# Altium PCB CP100-(5V1A)_V1.0.PcbDoc
Units mm, origin at the board's own origin, x right, y up, seen from the top; angles counter-clockwise.
Board outline 28 x 43 mm, 2 copper layers (Top Layer, Bottom Layer); 13 components, 13 nets, 42 pads, 3 vias.
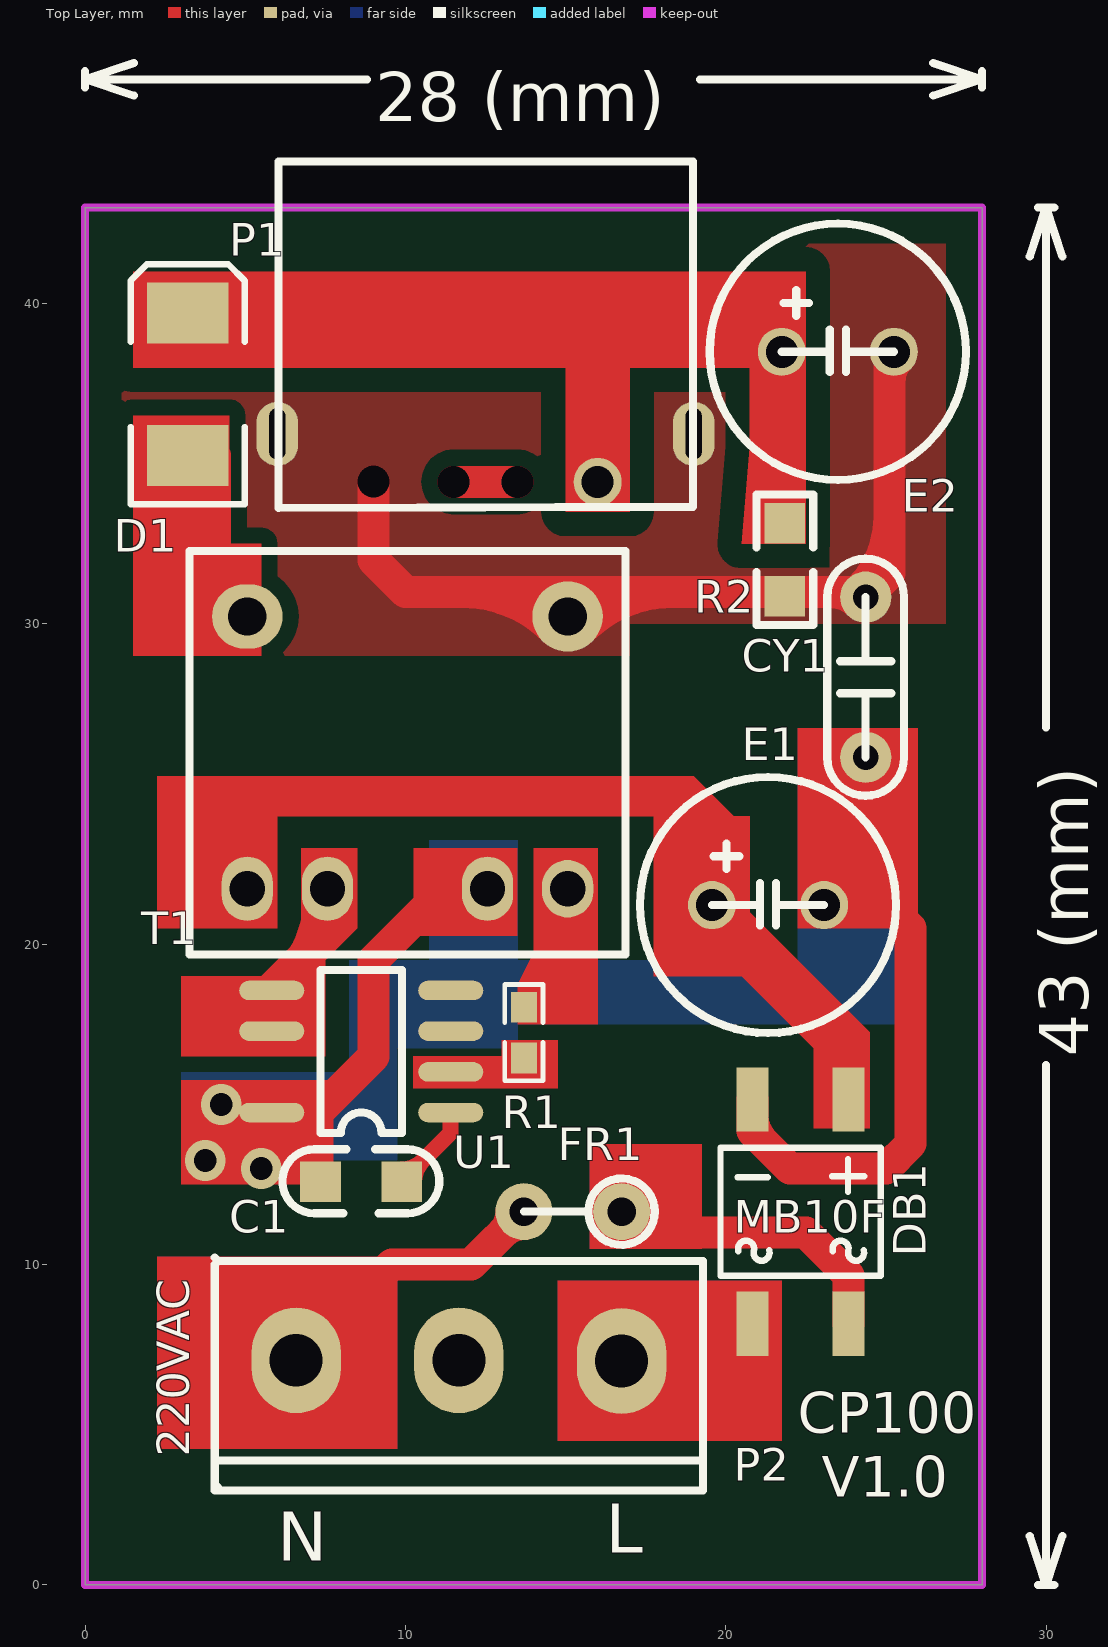
[diagram p0: Top Layer view]
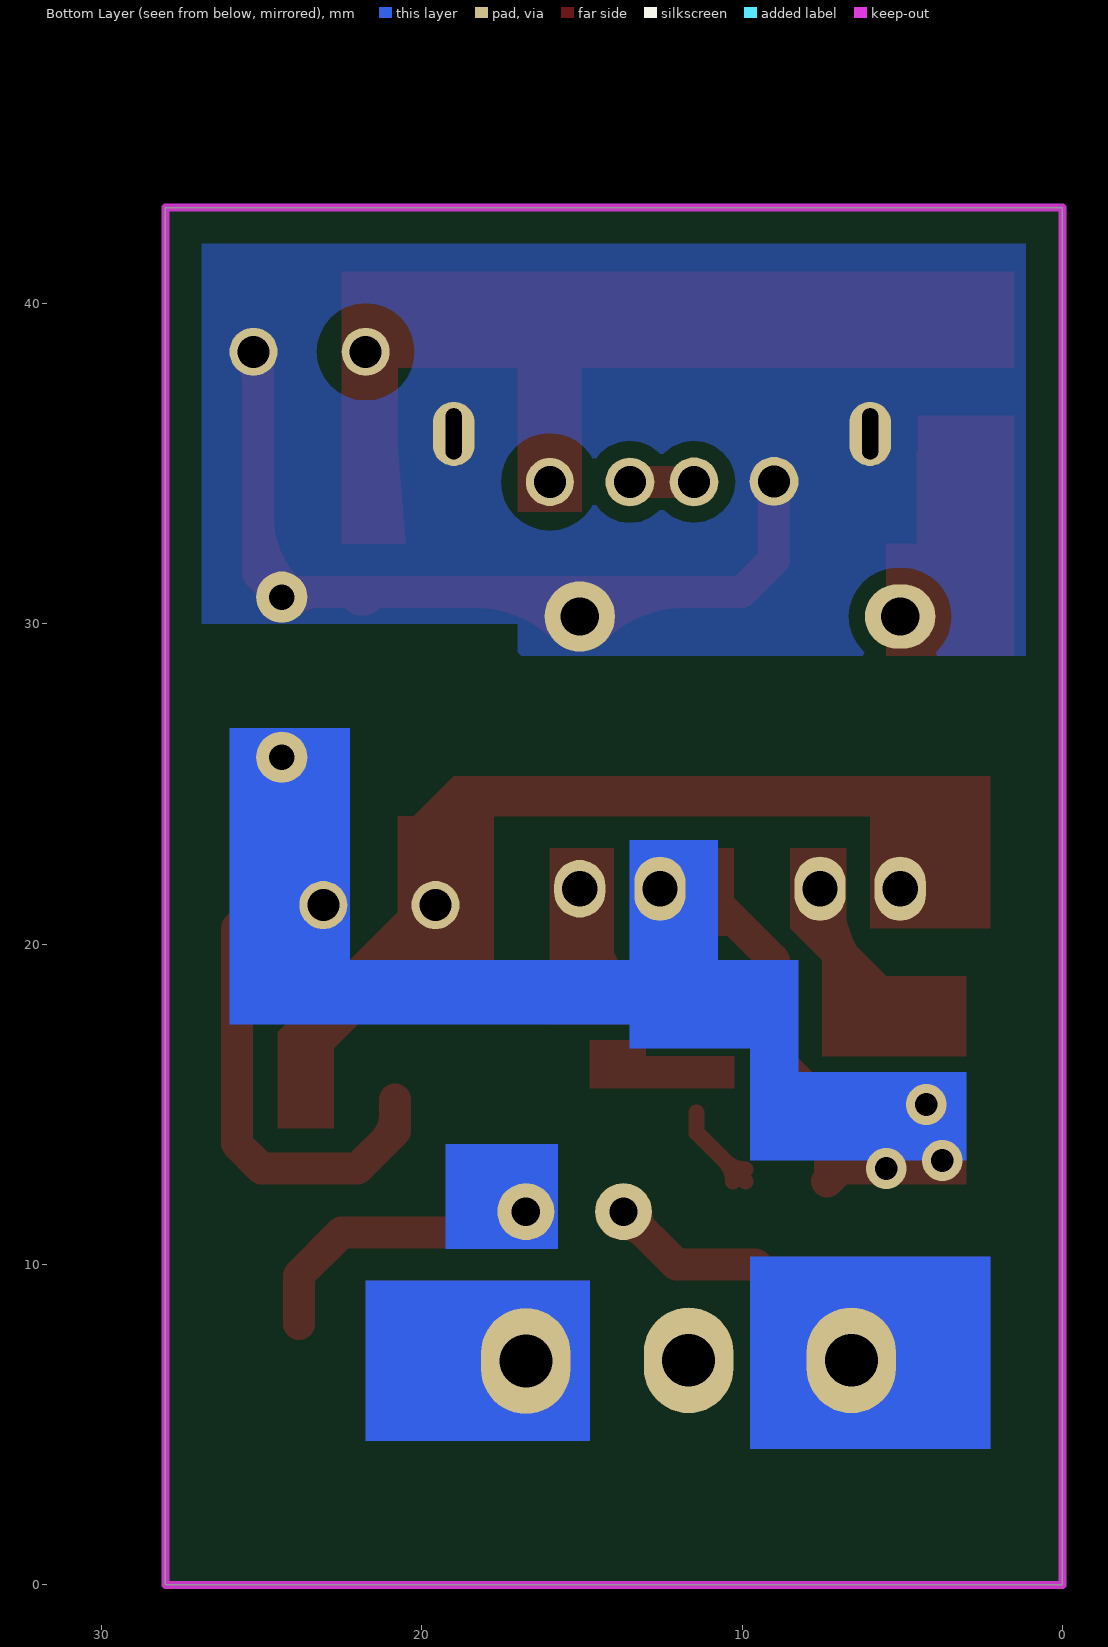
[diagram p1: Bottom Layer view, seen from below]

## Layer stack, top to bottom
Top Layer: signal copper 0.0356
Dielectric: dielectric 0.32, FR-4, Dk 4.8
Bottom Layer: signal copper 0.0356

## Board outline
0,0 0,43 28,43 28,0

## Design rules (kind name [scope] priority, off if disabled: settings)
Clearance "All to Keep-Out Layer" [All vs OnLayer('Keep-Out Layer')] p1: gap=1
Clearance "GND to 5V" [InNet('GND') vs InNet('5V')] p2: gap=0.762
Clearance "GND to All" [InNet('GND')] p3: gap=0.508
Clearance [All] p4: gap=0.254
HoleSize [All] p1: absolutevalues=TRUE maxlimit=25.4 minlimit=0.025 maxpercent=80.000 minpercent=20.000
MinimumSolderMaskSliver [All] p1: minsoldermaskwidth=0
PlaneConnect [All] p1: planeconnectstyle=Direct reliefexpansion=0.508 reliefentries=4 reliefconductorwidth=0.254 reliefairgap=0.254
PolygonConnect [All] p1: connectstyle=Direct reliefconductorwidth=0.254 reliefentries=4 polygonreliefangle="90 Angle"
RoutingVias [All] p1: holewidth=0.711 width=1.27 viastyle="Through Hole" minholewidth=0.711 minwidth=1.27 maxholewidth=0.711 maxwidth=1.27
SilkToSilkClearance [All] p1: silktosilkclearance=0
SilkscreenOverComponentPads [All] p1: minsilkscreentomaskgap=0
SolderMaskExpansion [All] p1: expansion=0.102
Width [All] p1: maxlimit=254 minlimit=0.254 preferedwidth=0.254
23 further rules are at their usual default settings.

## Components (designator, comment, footprint, x,y, rotation, side; value= is the part's Value field where it differs from the comment)
C1 "1uF/16V" 0805_C 8.62,12.588 r180 top
CY1 "102M/1KV" CY-5MM 24.368,28.336 r90 top
D1 "SS24" DO-214AC(SMA) 3.2,37.48 r270 top
DB1 "MB10F" MB10F 22.336,11.652 r90 top (schematic designator BD1)
E1 "4.7uF/400V" CS_220uF/25V 21.32,21.224 r0 top
E2 "470uF/10V" CS_470uF/16V 23.5,38.496 r0 top
FR1 "10R/0.5W" R0.12L 16.748,11.652 r180 top
P1 "USB-A" USB-AF10.6/90 16,34.432 r180 top locked
P2 "220VAC" KF5.08-3P 11.668,7 r180 top locked
R1 "110K/1%" 0603_RN 13.7,17.24 r90 top
R2 "1.2K" 0805_R 21.844,32.004 r90 top
T1 "EE12.7 5+5(V)" "EE12.7 5+5(V)" 5.064,21.732 r90 top locked
U1 "LP3667B" SOP7 8.62,16.652 r180 top

## Footprints (in the part's own frame and the unit in brackets; to place one, negate y for a bottom-side part, rotate by r counter-clockwise, add the part's x,y. Pads: shape width x height; smd on the part's side, far side on the other; paste and mask are expansions set on the pad)
0603_RN [mm] "SMD Resistor"
  rect 0.96x0.8 smd: 1(-0.79,0) 2(0.79,0)
  silkscreen extent -1.5,-0.6 1.5,0.6
0805_C [mm] "SMD Capacitor"
  rect 1.27x1.27 smd: 1(-1.27,0) 2(1.27,0)
  silkscreen extent -2.44,-1.01 2.46,0.99
0805_R [mil] "SMD Resistor"
  rect 50x50 smd: 1(-45,0) 2(45,0)
  silkscreen extent -80,-35 80,35
CS_220uF/25V [mm] "PTH  Electrolytic  Capacitor"
  round 1.5 hole 1: 1(-1.75,0) 2(1.75,0)
  silkscreen extent -4,-4 4,4
CS_470uF/16V [mm] "PTH  Electrolytic  Capacitor"
  round 1.5 hole 1: 1(-1.75,0) 2(1.75,0)
  silkscreen extent -4,-4 4,4
CY-5MM [mm]
  round 1.6 hole 0.8: 1(-2.5,0) 2(2.5,0)
  silkscreen extent -3.7,-1.2 3.7,1.2
DO-214AC(SMA) [mil] "SMD Diode"
  rect 75x100 smd: A(87.5,0) K(-87.5,0)
  silkscreen extent -147,-70 148,70
"EE12.7 5+5(V)" [mm]
  oval 2x1.6 hole 1.1: 1(0,0) 2(0,-2.5) 4(0,-7.5)
  oval 1.8x1.6 hole 1.1: 5(0,-10)
  round 2.2 hole 1.2: 6(8.5,-10)
  oval 2x2.2 hole 1.2: 10(8.5,0)
  silkscreen extent -2.05,-11.8 10.55,1.8
KF5.08-3P [mil]
  oval 110x130 hole 65: 1(-200,0.5) 2(0,-0.5) 3(200,-0.5)
  silkscreen extent -300,-127 300,160
MB10F [mm]
  rect 2x1 smd: 1(-3.5,1.5) 2(-3.5,-1.5) 3(3.5,-1.5) 4(3.5,1.5)
  silkscreen extent -2,-2.5 2,2.5
R0.12L [mil]
  round 70 hole 35: 1(0,0) 2(120,0)
  silkscreen extent -41,-41 120,41
SOP7 [mil]
  oval 80x24 smd: 1(-110,75) 2(-110,25) 3(-110,-25) 4(-110,-75) 5(110,-75) 6(110,-25) 7(110,75)
  silkscreen extent -50,-100 50,100
USB-AF10.6/90 [mm]
  round 1.5 hole 1: 1(0,0)
  round 0 / inner round 1.524 / far side round 1.524 hole 1: 2(2.5,0) 3(4.5,-0.003) 4(7,-0.018)
  oval 1.3x2 hole 0.5 slot 1.6 at 90 deg: 5(-3,-1.5) 5(10,-1.5)
  silkscreen extent -2.98,-10 9.97,0.81

## Part data
C1 CY1: library part Cap1
D1: library part Diode-A, "SS14,SS24,SS34,M7"
E1 E2: library part "Cap Pol1"
FR1 R1 R2: library part Res1
P2: library part "Header 3", "Header, 3-Pin"
U1: "LP3667A, LP3667B, LP3667AH, LP3667BH"

## Via types
v1: diameter 1.27, hole 0.711, Top Layer to Bottom Layer, 3 vias

## Nets (pads, with @x,y where several pads share a name; then routed paths per layer and width w, separated by ;. In a path a pad name is that pad's centre, name@x,y a point inside that pad or via, vN(x,y) a via of type N, cw(c..) or ccw(c..) an arc to the next point about the centre after c; other vN are vias at no path point)
+5V: D1.K E2.1 P1.1 R2.2 | length 24.8
  Top Layer w1: D1.K@3.837,39.383 cw(c4.61,38.61) 4.61,39.703 cw(c4.61,40.795) D1.K@3.837,40.022 ; D1.K@4.048,39.703 17,39.703 ; P1.1 16,38.703 17,39.703 ; 21.404,39.703 17,39.703
GND: CY1.2 E2.2 P1.4 P1.5 R2.1 T1.6 | length 40.9
  Top Layer w1: P1.4 9,32 10,31 15.064,31 24.204,31 CY1.2 25.11,31.578 E2.2@25.11,38.496 ; 11.761,31 cw(c11.761,26.929) T1.6@14.64,29.808 ; 14.176,31 cw(c14.176,29.344) T1.6@15.347,30.515 ; T1.6@14.781,30.515 cw(c15.952,29.344) 15.952,31 ; T1.6@15.488,29.808 cw(c18.367,26.929) 18.367,31 ; 21.183,31 cw(c21.183,30.2) R2.1@21.749,30.766 ; R2.1@21.939,30.766 cw(c22.505,30.2) 22.505,31 ; 23.248,31 cw(c23.248,29.716) CY1.2@24.156,30.624 ; CY1.2@24.156,31.048 ccw(c21.852,33.352) 25.11,33.352 ; 25.11,37.554 cw(c26.192,37.554) E2.2@25.427,38.319
GND_P: C1.2 CY1.1 DB1.4 E1.2 T1.4 U1.7 | length 42.7
  Top Layer w1: U1.7 5.826,14.112 ; U1.7@6.356,14.819 ccw(c7.7,14.284) 6.677,13.261 ; U1.7@6.438,14.579 ccw(c6.745,15.1) 7.172,14.672 ; U1.7@6.537,14.552 ccw(c6.537,15.794) 7.416,14.916 ; C1.2 5.826,14.112 ; T1.4 11.232,21.732 9,19.5 9,16.5 6.612,14.112 5.826,14.112 ; DB1.4@20.836,14.652 ccw(c22.014,14.652) 21.181,13.819 ; DB1.4 20.836,14.164 22,13 25,13 25.773,13.773 25.773,20.5 24.368,21.905 24.368,22.522 ; E1.2 24.368,22.522 ; CY1.1 24.368,24 24.368,22.522 ; 5.826,13.794 cw(c7.16,13.794) 6.43,14.91 ccw(c7.16,13.794) 5.826,13.794
  other v1: 5.5,13 3.75,13.25 4.25,15
L: DB1.1 P2.1 | length 8.8
  Top Layer w1: P2.1 19.751,6.987 DB1.1@20.876,8.112 ; P2.1@17.382,6.353 cw(c18.914,4.822) 18.914,6.987 cw(c18.914,9.153) P2.1@17.382,7.622 ; 20.119,7.355 cw(c20.836,6.638) DB1.1@20.836,7.652
N: FR1.2 P2.3 | length 13.9
  Top Layer w1: P2.3 9.575,10 12.048,10 FR1.2 ; P2.3@6.588,8.164 ccw(c6.588,10.942) 8.553,8.978 ; P2.3@7.485,7.267 cw(c9.037,7.267) 7.94,8.364 ; FR1.2@13.311,11.652 cw(c12.372,11.652) 13.036,10.988 cw(c13.7,10.324) FR1.2@13.7,11.263
NetC1_1: C1.1 U1.1 | length 4.3
  Top Layer w0.5: C1.1 11.414,14.112 U1.1 ; C1.1@9.89,12.973 ccw(c9.89,13.902) 10.547,13.245 ccw(c11.204,12.588) C1.1@10.275,12.588
NetD1_A: D1.A T1.10 | length 7.7
  Top Layer w1: D1.A@3.198,34.938 cw(c1.144,32.884) 4.048,32.884 ; D1.A@4.048,35.258 4.048,31.248 T1.10
NetDB1_2: DB1.2 FR1.1 | length 11.9
  Top Layer w1: FR1.1 17.4,11 22.5,11 23.836,9.664 DB1.2 ; FR1.1@17.023,11.927 ccw(c19.261,14.165) 19.261,11
NetDB1_3: DB1.3 E1.1 T1.1 | length 24.6
  Top Layer w1: T1.1 5.064,23.064 ; 6.5,24.5 18,24.5 19.57,22.93 E1.1 23.836,16.958 DB1.3
NetP1_2: P1.2 P1.3 | length 2
  Top Layer w1: 11.503,34.432 P1.2
NetR1_1: R1.1 U1.2 | length 4.1
  Top Layer w0.5: U1.2 13.267,16.017 R1.1 ; 12.486,16.017 ccw(c12.486,17.584) R1.1@13.594,16.476 ; R1.1@13.307,16.057 cw(c13.7,15.665) R1.1@13.7,16.22
NetR1_2: R1.2 T1.5 | length 6.8
  Top Layer w0.5: R1.2 15.064,19.394 T1.5 ; R1.2@13.7,18.26 ccw(c13.7,18.815) R1.2@14.093,18.423 ; T1.5@14.675,21.243 cw(c13.736,20.304) 15.064,20.304 cw(c16.392,20.304) T1.5@15.453,21.243
NetT1_2: T1.2 U1.5 U1.6 | length 8.7
  Top Layer w1: U1.6 U1.5 7.564,20.295 T1.2 ; U1.5@6.342,18.557 cw(c7.588,18.557) 6.707,19.438 ; 6.445,19.176 ccw(c4.423,21.197) T1.2@7.266,21.5
pads on no net: P2.2 U1.3 U1.4

## Polygon pours and split planes (outlines as drawn)
GND on Top Layer "Bot Layer-No Net" (solid, remove dead copper, pour order 1000): 1,42.4 27.4,42.4 27.4,30 17,30 17,29 1,29 1,42.4
GND on Bottom Layer "Bot Layer-No Net" (solid, remove dead copper, pour order 1001): 1,42.4 27.4,42.4 27.4,30 17,30 17,29.115 16.885,29 1,29 1,42.4

## Keep-outs
Keep-Out Layer:
  the board outline again, w0.254

## Other copper
Top Layer:
  rectangle net GND_P: 10.25,20.25 13.5,23
  region net NetT1_2: 6.75,23 6.75,20.75 6.5,20 5.5,19 3,19 3,16.5 7.5,16.5 7.5,19.5 8.5,20.5 8.5,23
  region net NetR1_1: 10.25,16.5 10.25,15.5 14.75,15.5 14.75,17 13,17 13,16.5
  region net NetR1_2: 14,23 14,19.75 13.5,18.74 13.5,17.5 16,17.5 16,23
  region net N: 2.25,10.25 9.75,10.25 9.75,4.25 2.25,4.25
  region net L: 14.75,9.5 21.75,9.5 21.75,4.5 14.75,4.5
  region net NetDB1_2: 15.75,13.75 19.25,13.75 19.25,10.5 15.75,10.5
  region net +5V: 1.5,41 1.5,38 20.75,38 20.75,35.5 20.5,32.5 22.5,32.5 22.5,41
  region net NetD1_A: 1.5,29 5.5,29 5.5,32.5 4.5,32.5 4.5,36.5 1.5,36.5
  region net +5V: 15,40 15,33.5 17,33.5 17,40.203 16.798,40
  region net NetDB1_3: 6,20.5 2.25,20.5 2.25,25.25 19,25.25 20.25,24 6,24
  region net NetDB1_3: 17.75,25.25 17.75,19 20.75,19 20.75,24 19,24
  region net NetDB1_3: 22.75,16.75 22.75,14.25 24.5,14.25 24.5,17.25 20.5,21.25 20,21.25 20,19.5
  region net GND_P: 22.25,26.75 26,26.75 26,20.5 22.25,20.5
  region net GND_P: 3,15.75 7.75,15.75 7.75,12.5 3,12.5
Bottom Layer:
  region net N: 2.25,10.25 9.75,10.25 9.75,4.25 2.25,4.25
  region net L: 14.75,9.5 21.75,9.5 21.75,4.5 14.75,4.5
  region net GND_P: 10.75,23.25 10.75,19.5 8.25,19.5 8.25,16 3,16 3,13.25 9.75,13.25 9.75,16.75 13.5,16.75 13.5,23.25
  region net GND_P: 22.25,26.75 26,26.75 26,17.5 12.75,17.5 12.75,19.5 22.25,19.5
  region net NetDB1_2: 15.75,13.75 19.25,13.75 19.25,10.5 19,10.5 15.75,10.5

## Silkscreen, mask and mechanical layers (free items; w line width, h text height)
Top Overlay:
  lines w0.254: 0,46.746 0,47.254 ; 1.524,46.492 0,47 ; 1.524,47.508 0,47 ; 8.801,47 0,47 ; 19.199,47 28,47 ; 26.476,46.492 28,47 ; 26.476,47.508 28,47 ; 28,46.746 28,47.254 ; 29.492,1.524 30,0 ; 29.492,41.476 30,43 ; 29.746,0 30.254,0 ; 29.746,43 30.254,43 ; 30,16.236 30,0 ; 30,26.764 30,43 ; 30.508,1.524 30,0 ; 30.508,41.476 30,43
  text "28 (mm)" at 9.055,45.687 h1.52
  text "43 (mm)" at 31.313,16.49 h1.52 r90
  text "CP100" at 22.25,4.75 h1.27
  text "V1.0" at 23,2.75 h1.27
  text "L" at 16.25,1 h1.52
  text "N" at 6,0.75 h1.52